# Altium PCB LP_LED_CUBE_8x8x8.PcbDoc (part 1 of 2)
Units mil, origin at the board's own origin, x right, y up, seen from the top; angles counter-clockwise.
Board outline 5225 x 2860 mil, 2 copper layers (Top Layer, Bottom Layer); 188 components, 245 nets, 933 pads, 0 vias.
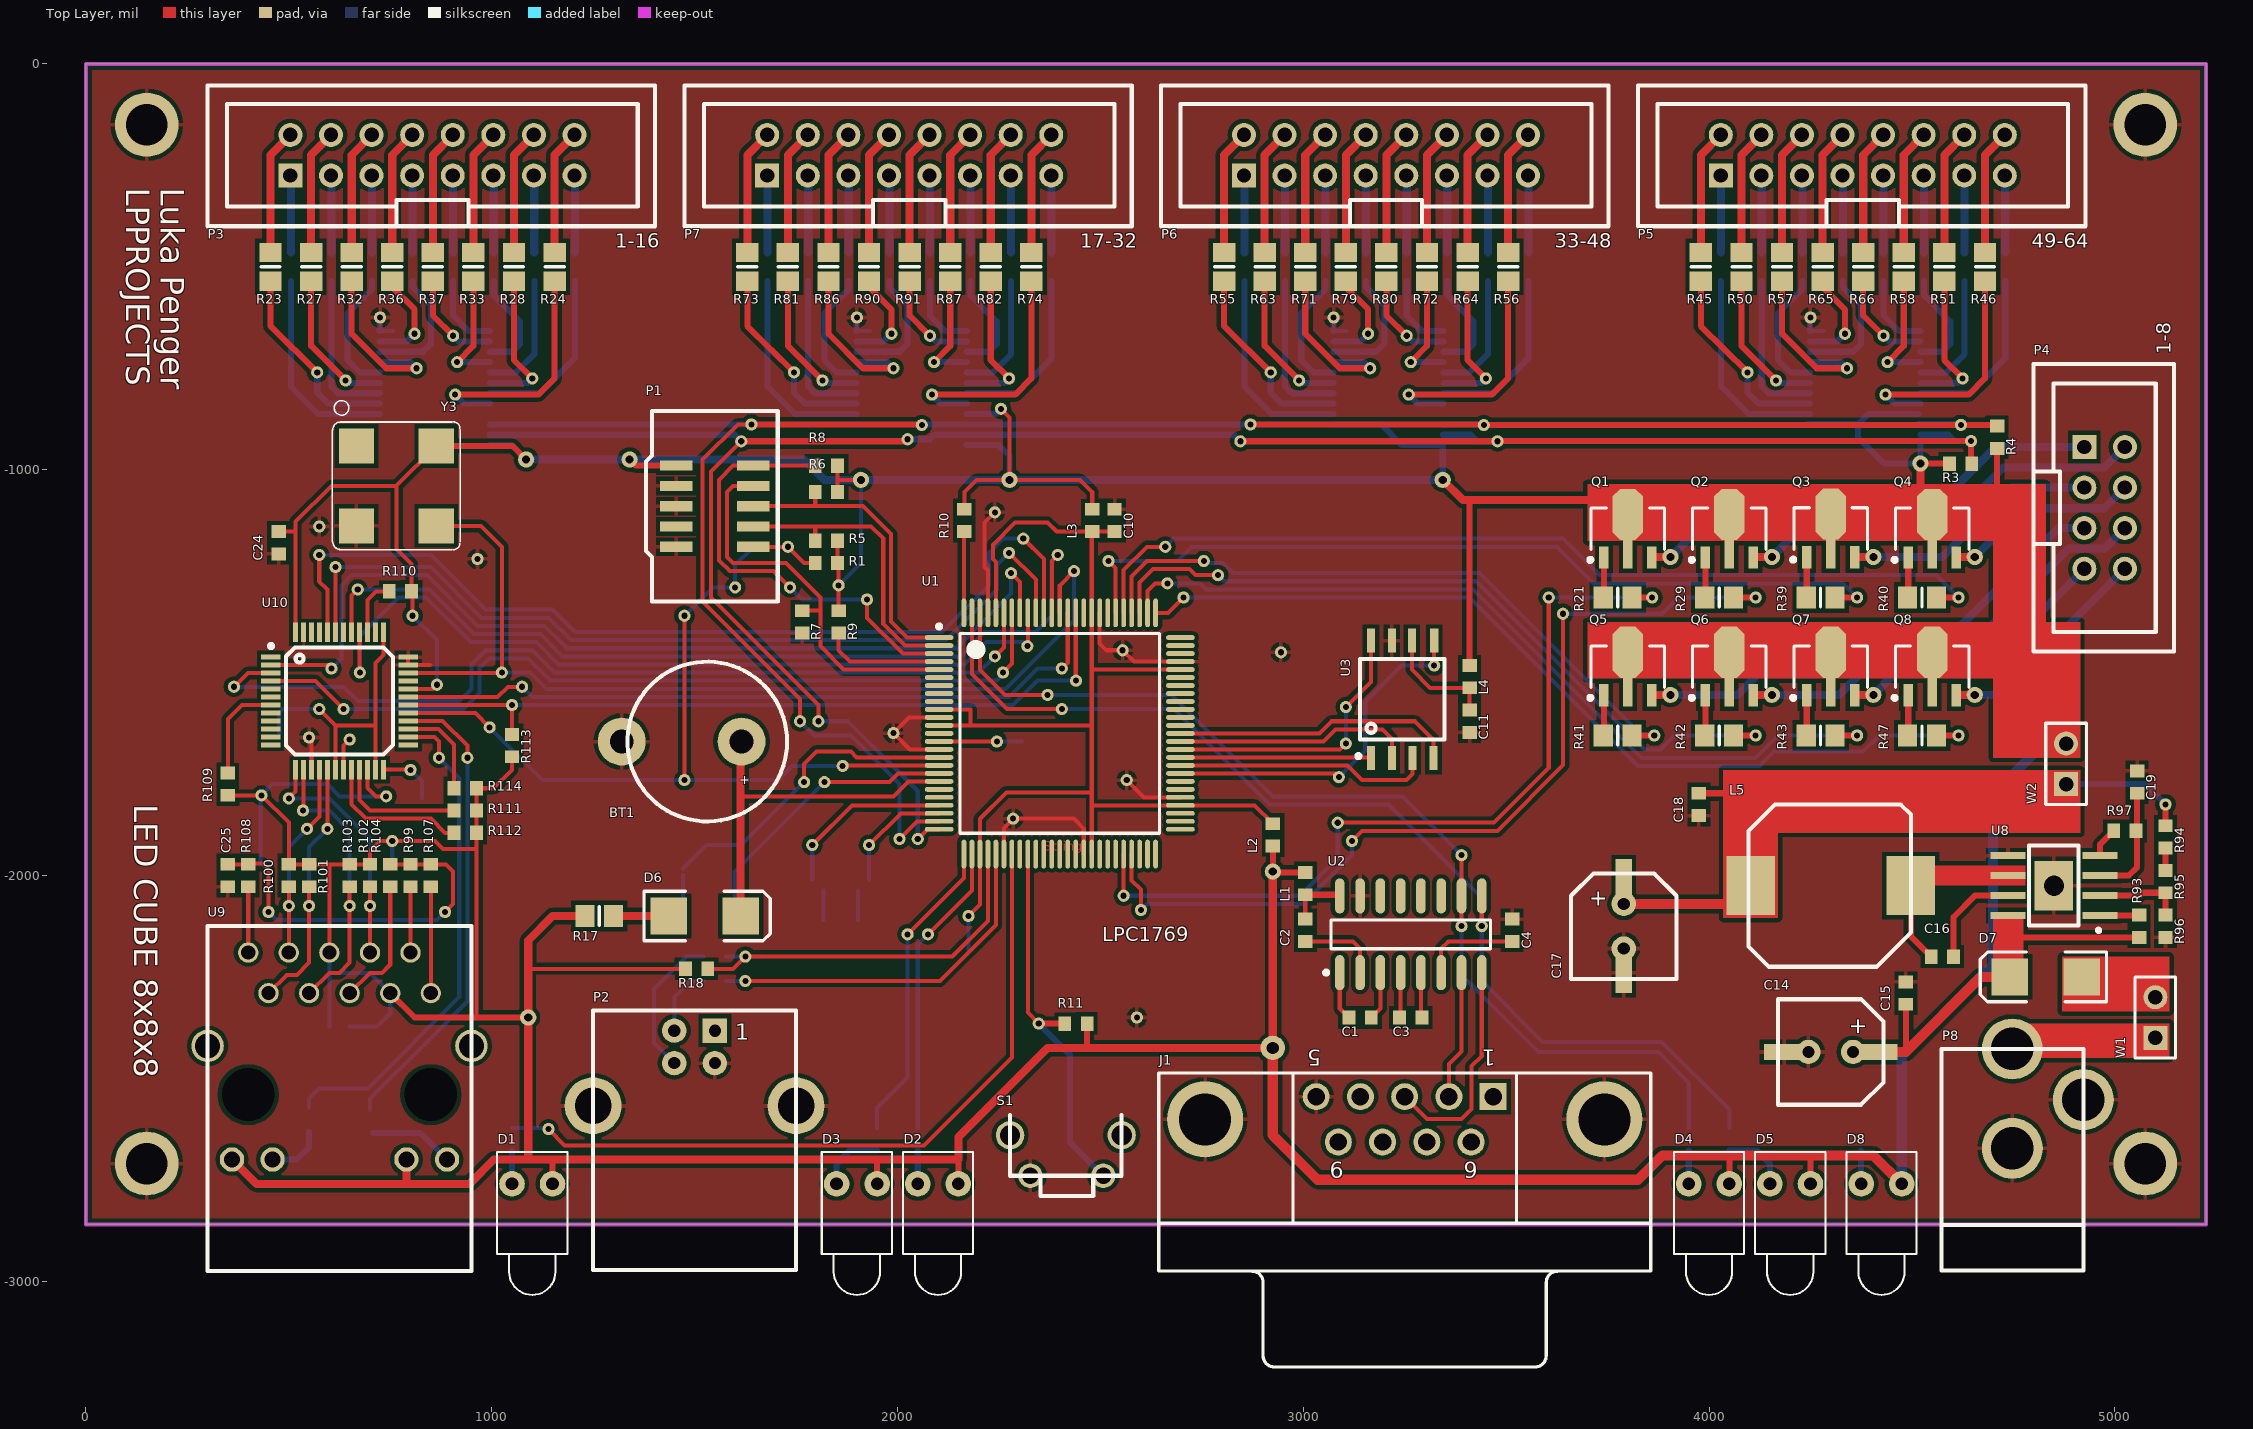
[diagram p0: Top Layer view]
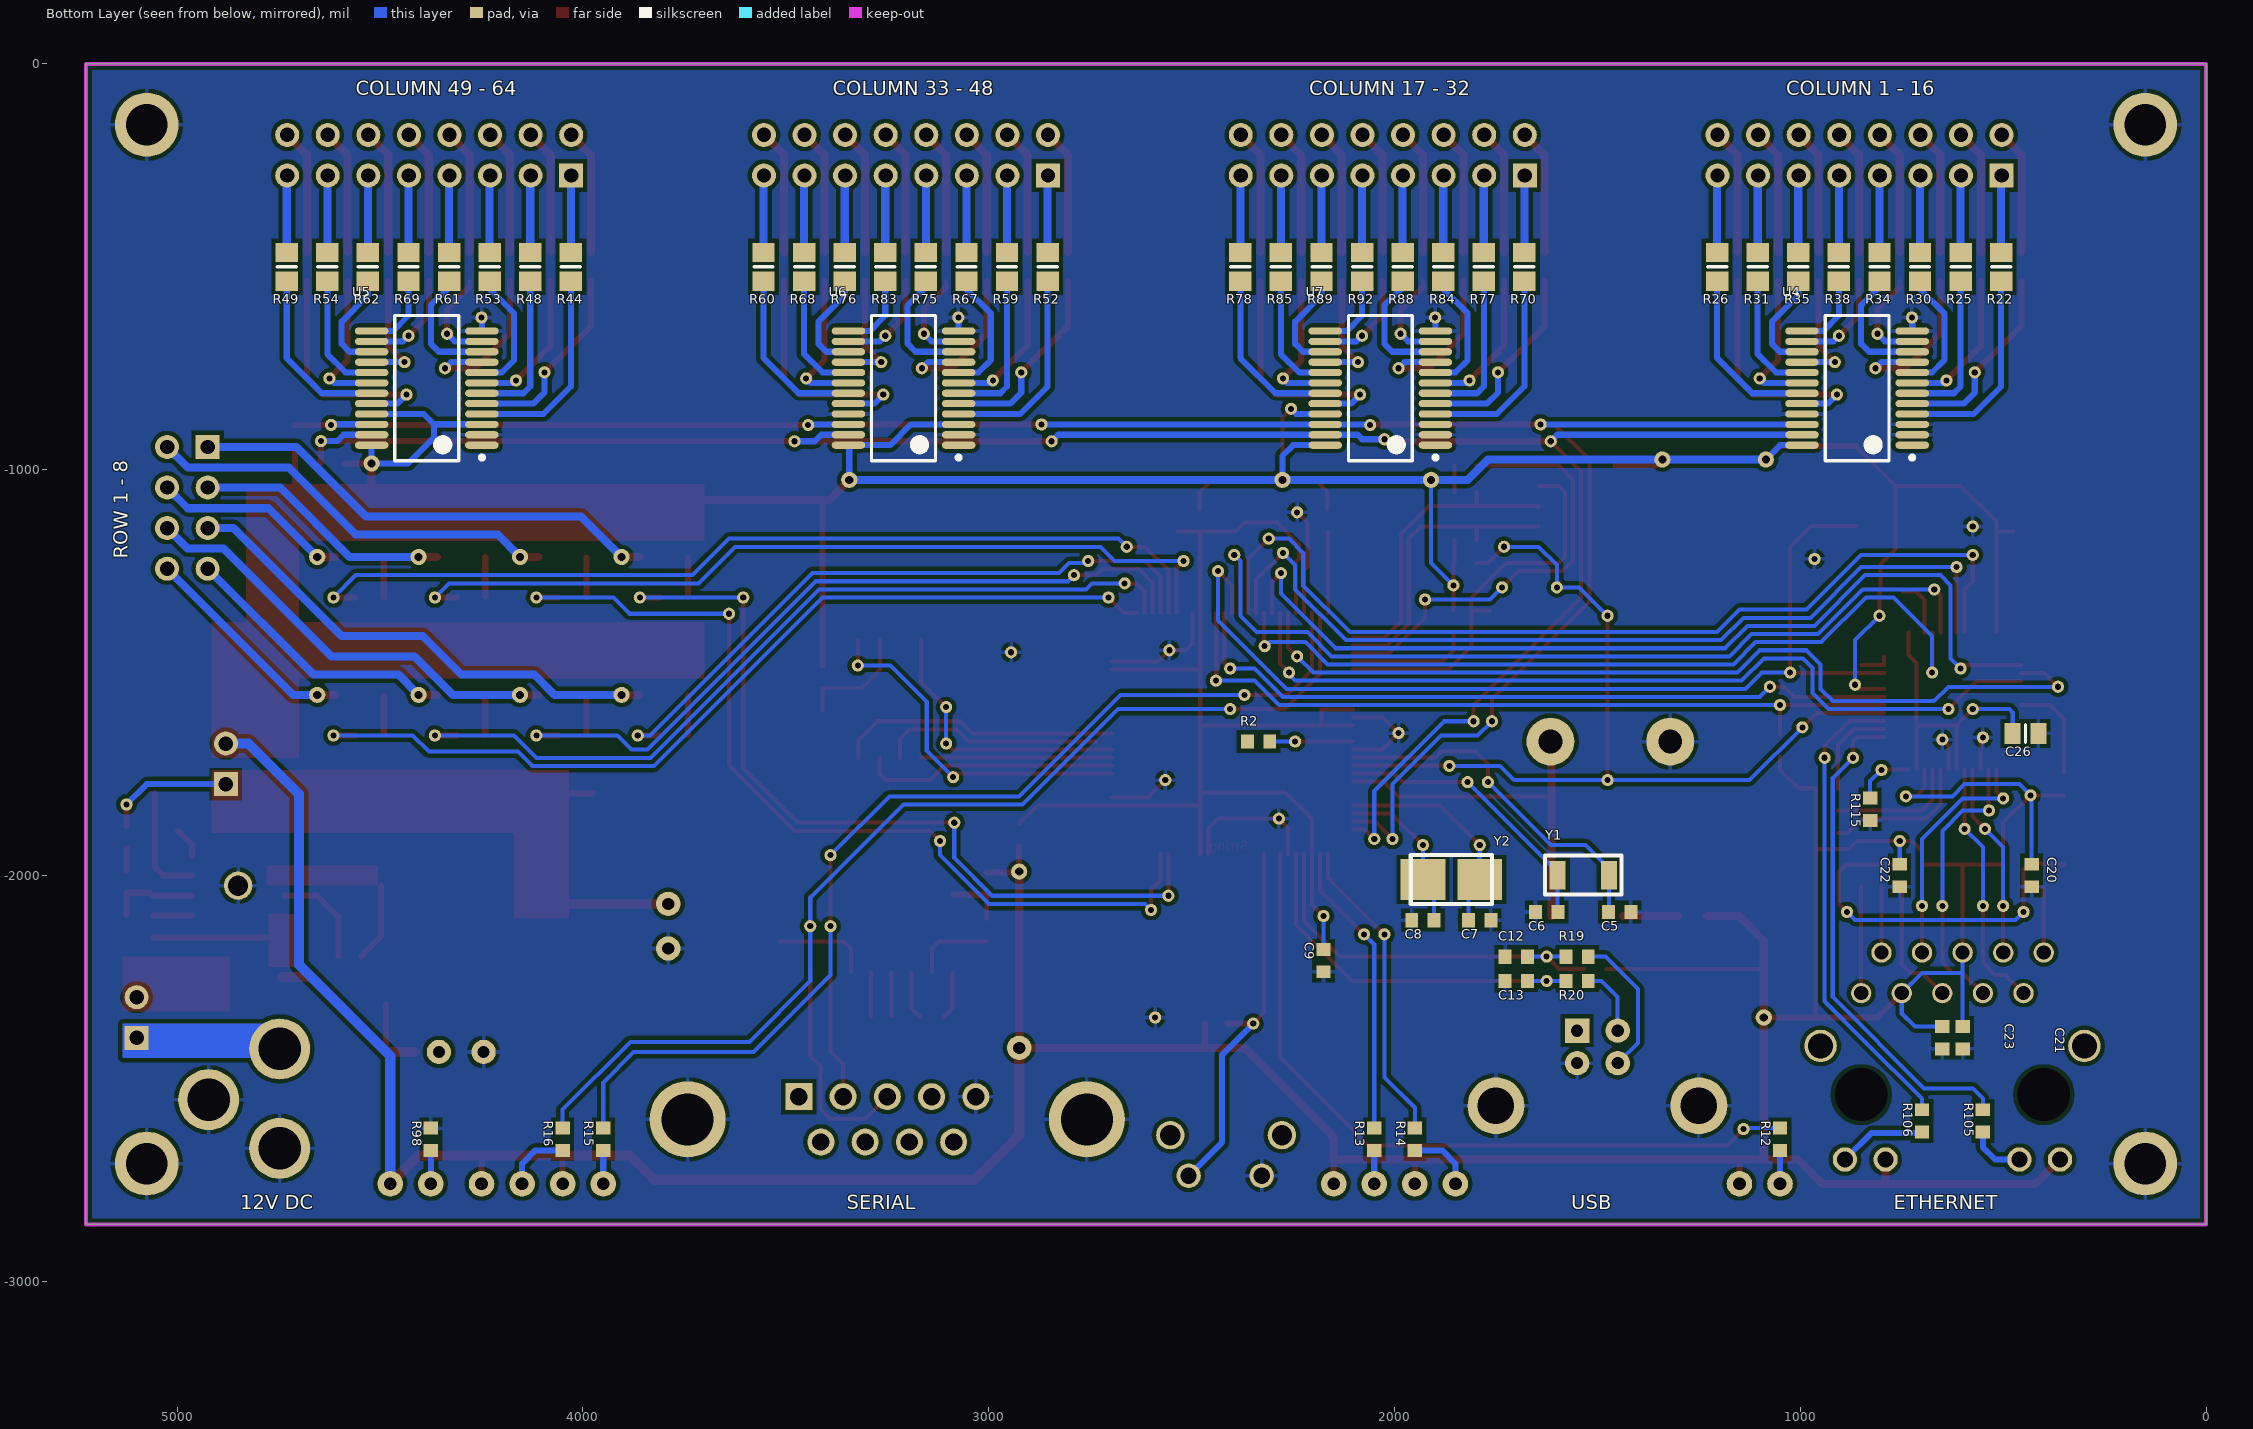
[diagram p1: Bottom Layer view, seen from below]

## Layer stack, top to bottom
Top Layer: signal copper 1.4
Dielectric: dielectric 12.6, FR-4, Dk 4.8
Bottom Layer: signal copper 1.4

## Board outline
5225,-2860 5225,0 0,0 0,-2860

## Design rules (kind name [scope] priority, off if disabled: settings)
Clearance [All] p1: gap=10
PolygonConnect [All] p1: connectstyle=Relief reliefconductorwidth=10 reliefentries=4 polygonreliefangle="90 Angle"
RoutingVias [All] p1: holewidth=28 width=50 viastyle="Through Hole" minholewidth=28 minwidth=50 maxholewidth=28 maxwidth=50
SilkscreenOverComponentPads [All] p1: minsilkscreentomaskgap=10
SolderMaskExpansion [All] p1: expansion=4
Width [All] p1: maxlimit=10 minlimit=10 preferedwidth=10
27 further rules are at their usual default settings.

## Classes and differential pairs
component class POWER: C14 C15 C16 C17 C18 C19 D7 D8 L5 P8 R93 R94 R95 R96 R97 R98 U8 W1 W2
component class LED: P3 P4 P5 P6 P7 Q1 Q2 Q3 Q4 Q5 Q6 Q7 Q8 R21 R22 R23 R24 R25 R26 R27 R28 R29 R30 R31 R32 R33 R34 R35 R36 R37 R38 R39 R40 R41 R42 R43 R44 R45 R46 R47 R48 R49 R50 R51 R52 R53 R54 R55 R56 R57 R58 R59 R60 R61 R62 R63 R64 R65 R66 R67 R68 R69 R70 R71 R72 R73 R74 R75 R76 R77 R78 R79 R80 R81 R82 R83 R84 R85 R86 R87 R88 R89 R90 R91 R92 U4 U5 U6 U7
component class ETH: C20 C21 C22 C23 C24 C25 C26 R99 R100 R101 R102 R103 R104 R105 R106 R107 R108 R109 R110 R111 R112 R113 R114 R115 U9 U10 Y3
component class CPU: BT1 C1 C2 C3 C4 C5 C6 C7 C8 C9 C10 C11 C12 C13 D1 D2 D3 D4 D5 D6 J1 L1 L2 L3 L4 P1 P2 R1 R2 R3 R4 R5 R6 R7 R8 R9 R10 R11 R12 R13 R14 R15 R16 R17 R18 R19 R20 S1 U1 U2 U3 Y1 Y2

## Components (designator, comment, footprint, x,y, rotation, side; value= is the part's Value field where it differs from the comment)
BT1 "Battery" "Battery capacitor" 1665,-1670 r180 top locked
C1 "100n" 1608[0603] 3140,-2350 r180 top locked
C2 "100n" 1608[0603] 3005,-2135 r90 top locked
C3 "100n" 1608[0603] 3265,-2350 r180 top locked
C4 "100n" 1608[0603] 3515,-2135 r270 top locked
C5 "22p" 1608[0603] 1445,-2090 r0 bottom
C6 "22p" 1608[0603] 1625,-2090 r180 bottom
C7 "22p" 1608[0603] 1790,-2110 r0 bottom locked
C8 "22p" 1608[0603] 1930,-2110 r180 bottom locked
C9 "100n" 1608[0603] 2175,-2210 r270 bottom locked
C10 "100n" 1608[0603] 2535,-1125 r270 top
C11 "100n" 1608[0603] 3410,-1620 r90 top
C12 "18p" 1608[0603] 1700,-2200 r0 bottom locked
C13 "18p" 1608[0603] 1700,-2260 r0 bottom locked
C14 "220uF" "SMD CAPACITOR 220uF" 4300,-2435 r270 top locked
C15 "100n" 1608[0603] 4485,-2290 r90 top
C16 "0.47uF" 1608[0603] 4575,-2200 r180 top locked
C17 "220uF" "SMD CAPACITOR 220uF" 3790,-2125 r0 top locked
C18 "100n" 1608[0603] 3975,-1825 r270 top locked
C19 "0.47uF" 1608[0603] 5055,-1770 r90 top
C20 "100n" 1608[0603] 430,-2000 r90 bottom locked
C21 "100n" 1608[0603] 650,-2400 r90 bottom
C22 "100n" 1608[0603] 755,-2000 r90 bottom locked
C23 "100n" 1608[0603] 600,-2400 r90 bottom
C24 "100n" 1608[0603] 475,-1180 r90 top locked
C25 "100n" 1608[0603] 350,-2000 r270 top locked
C26 "100n" 6-0805_L 445,-1650 r180 bottom locked
D1 "USB LED" LED-1 1100,-2760 r270 top locked
D2 "LED1" LED-1 2100,-2760 r270 top locked
D3 "LED2" LED-1 1900,-2760 r270 top locked
D4 "LED4" LED-1 4000,-2760 r270 top locked
D5 "LED5" LED-1 4200,-2760 r270 top locked
D6 "D Schottky" SMB 1525,-2100 r0 top locked
D7 "Schottky" SMB 4830,-2250 r180 top locked
D8 "POWER LED" LED-1 4425,-2760 r270 top locked
J1 "RS232" DSUB1.385-2H9 3250,-2975 r180 top locked
L1 "Inductor" 1608[0603] 3005,-2020 r90 top locked
L2 "Inductor" 1608[0603] 2925,-1900 r90 top locked
L3 "Inductor" 1608[0603] 2480,-1125 r270 top
L4 "Inductor" 1608[0603] 3410,-1510 r90 top
L5 "1.5uH" Inductor 4300,-2025 r180 top locked
P1 "JTAG Connector ULINK" "JTAG Connector ULINK" 1550,-1090 r0 top locked
P2 "USB B" "USB B" 1500,-2475 r0 top locked
P3 "Header 8X2" IDC-2x8 300,-400 r0 top locked
P4 "Header 8" IDC-2x4 4800,-740 r270 top
P5 "Header 8X2" IDC-2x8 3825,-400 r0 top locked
P6 "Header 8X2" IDC-2x8 2650,-400 r0 top locked
P7 "Header 8X2" IDC-2x8 1475,-400 r0 top locked
P8 "DC Connector" "DC Connector" 4835,-2550 r180 top locked
Q1 "NPN" SOT89N 3800,-1145.43 r90 top locked
Q2 "NPN" SOT89N 4050,-1145.43 r90 top locked
Q3 "NPN" SOT89N 4300,-1145 r90 top
Q4 "NPN" SOT89N 4550,-1145.43 r90 top locked
Q5 "NPN" SOT89N 3800,-1485.43 r90 top locked
Q6 "NPN" SOT89N 4050,-1485.43 r90 top locked
Q7 "NPN" SOT89N 4300,-1485.43 r90 top locked
Q8 "NPN" SOT89N 4550,-1485.43 r90 top locked
R1 "10k" 1608[0603] 1825,-1230 r0 top locked
R2 "NO" 1608[0603] 2335,-1670 r0 bottom locked
R3 "2k2" 1608[0603] 4620,-985 r0 top locked
R4 "2k2" 1608[0603] 4710,-920 r90 top locked
R5 "10k" 1608[0603] 1825,-1175 r0 top locked
R6 "10k" 1608[0603] 1825,-1055 r0 top
R7 "10k" 1608[0603] 1765,-1375 r270 top
R8 "10k" 1608[0603] 1825,-990 r0 top locked
R9 "10k" 1608[0603] 1855,-1375 r90 top locked
R10 "10k" 1608[0603] 2165,-1125 r90 top locked
R11 "1k" 1608[0603] 2440,-2365 r180 top locked
R12 "470R" 1608[0603] 1050,-2650 r270 bottom locked
R13 "470R" 1608[0603] 2050,-2650 r270 bottom locked
R14 "470R" 1608[0603] 1950,-2650 r270 bottom locked
R15 "470R" 1608[0603] 3950,-2650 r270 bottom locked
R16 "470R" 1608[0603] 4050,-2650 r270 bottom locked
R17 "50R" 6-0805_N 1265,-2100 r180 top locked
R18 "1k5" 1608[0603] 1505,-2230 r0 top locked
R19 "33R" 1608[0603] 1550,-2200 r180 bottom locked
R20 "33R" 1608[0603] 1550,-2260 r180 bottom locked
R21 "1k" 6-0805_N 3775,-1315 r0 top locked
R22 "100R" 6-0805_N 505,-500 r270 bottom locked
R23 "100R" 6-0805_N 455,-500 r270 top locked
R24 "100R" 6-0805_N 1155,-500 r90 top locked
R25 "100R" 6-0805_N 605,-500 r270 bottom locked
R26 "100R" 6-0805_N 1205,-500 r90 bottom locked
R27 "100R" 6-0805_N 555,-500 r270 top locked
R28 "100R" 6-0805_N 1055,-500 r90 top locked
R29 "1k" 6-0805_N 4025,-1315 r0 top locked
R30 "100R" 6-0805_N 705,-500 r270 bottom locked
R31 "100R" 6-0805_N 1105,-500 r90 bottom locked
R32 "100R" 6-0805_N 655,-500 r270 top locked
R33 "100R" 6-0805_N 955,-500 r90 top locked
R34 "100R" 6-0805_N 805,-500 r270 bottom locked
R35 "100R" 6-0805_N 1005,-500 r90 bottom locked
R36 "100R" 6-0805_N 755,-500 r270 top locked
R37 "100R" 6-0805_N 855,-500 r90 top locked
R38 "100R" 6-0805_N 905,-500 r90 bottom locked
R39 "1k" 6-0805_N 4275,-1315 r0 top locked
R40 "1k" 6-0805_N 4525,-1315 r0 top locked
R41 "1k" 6-0805_N 3775,-1655 r0 top locked
R42 "1k" 6-0805_N 4025,-1655 r0 top locked
R43 "1k" 6-0805_N 4275,-1655 r0 top locked
R44 "100R" 6-0805_N 4030,-500 r270 bottom locked
R45 "100R" 6-0805_N 3980,-500 r270 top locked
R46 "100R" 6-0805_N 4680,-500 r90 top locked
R47 "1k" 6-0805_N 4525,-1655 r0 top locked
R48 "100R" 6-0805_N 4130,-500 r270 bottom locked
R49 "100R" 6-0805_N 4730,-500 r90 bottom locked
R50 "100R" 6-0805_N 4080,-500 r270 top locked
R51 "100R" 6-0805_N 4580,-500 r90 top locked
R52 "100R" 6-0805_N 2855,-500 r270 bottom locked
R53 "100R" 6-0805_N 4230,-500 r270 bottom locked
R54 "100R" 6-0805_N 4630,-500 r90 bottom locked
R55 "100R" 6-0805_N 2805,-500 r270 top locked
R56 "100R" 6-0805_N 3505,-500 r90 top locked
R57 "100R" 6-0805_N 4180,-500 r270 top locked
R58 "100R" 6-0805_N 4480,-500 r90 top locked
R59 "100R" 6-0805_N 2955,-500 r270 bottom locked
R60 "100R" 6-0805_N 3555,-500 r90 bottom locked
R61 "100R" 6-0805_N 4330,-500 r270 bottom locked
R62 "100R" 6-0805_N 4530,-500 r90 bottom locked
R63 "100R" 6-0805_N 2905,-500 r270 top locked
R64 "100R" 6-0805_N 3405,-500 r90 top locked
R65 "100R" 6-0805_N 4280,-500 r270 top locked
R66 "100R" 6-0805_N 4380,-500 r90 top locked
R67 "100R" 6-0805_N 3055,-500 r270 bottom locked
R68 "100R" 6-0805_N 3455,-500 r90 bottom locked
R69 "100R" 6-0805_N 4430,-500 r90 bottom locked
R70 "100R" 6-0805_N 1680,-500 r270 bottom locked
R71 "100R" 6-0805_N 3005,-500 r270 top locked
R72 "100R" 6-0805_N 3305,-500 r90 top locked
R73 "100R" 6-0805_N 1630,-500 r270 top locked
R74 "100R" 6-0805_N 2330,-500 r90 top locked
R75 "100R" 6-0805_N 3155,-500 r270 bottom locked
R76 "100R" 6-0805_N 3355,-500 r90 bottom locked
R77 "100R" 6-0805_N 1780,-500 r270 bottom locked
R78 "100R" 6-0805_N 2380,-500 r90 bottom locked
R79 "100R" 6-0805_N 3105,-500 r270 top locked
R80 "100R" 6-0805_N 3205,-500 r90 top locked
R81 "100R" 6-0805_N 1730,-500 r270 top locked
R82 "100R" 6-0805_N 2230,-500 r90 top locked
R83 "100R" 6-0805_N 3255,-500 r90 bottom locked
R84 "100R" 6-0805_N 1880,-500 r270 bottom locked
R85 "100R" 6-0805_N 2280,-500 r90 bottom locked
R86 "100R" 6-0805_N 1830,-500 r270 top locked
R87 "100R" 6-0805_N 2130,-500 r90 top locked
R88 "100R" 6-0805_N 1980,-500 r270 bottom locked
R89 "100R" 6-0805_N 2180,-500 r90 bottom locked
R90 "100R" 6-0805_N 1930,-500 r270 top locked
R91 "100R" 6-0805_N 2030,-500 r90 top locked
R92 "100R" 6-0805_N 2080,-500 r90 bottom locked
R93 "10k" 1608[0603] 5060,-2125 r270 top locked
R94 "0R" 1608[0603] 5125,-1905 r90 top locked
R95 "226k" 1608[0603] 5125,-2015 r90 top locked
R96 "49.9k" 1608[0603] 5125,-2125 r90 top locked
R97 "100k" 1608[0603] 5025,-1890 r0 top locked
R98 "470R" 1608[0603] 4375,-2650 r270 bottom locked
R99 "75R" 1608[0603] 800,-2000 r90 top locked
R100 "50R" 1608[0603] 500,-2000 r90 top
R101 "50R" 1608[0603] 550,-2000 r90 top
R102 "50R" 1608[0603] 700,-2000 r90 top locked
R103 "50R" 1608[0603] 650,-2000 r90 top locked
R104 "75R" 1608[0603] 750,-2000 r90 top locked
R105 "470R" 1608[0603] 550,-2605 r90 bottom locked
R106 "470R" 1608[0603] 700,-2605 r90 bottom locked
R107 "75R" 1608[0603] 850,-2000 r270 top locked
R108 "75R" 1608[0603] 400,-2000 r270 top locked
R109 "10k" 1608[0603] 350,-1775 r270 top locked
R110 "2k2" 1608[0603] 775,-1300 r180 top locked
R111 "2k2" 1608[0603] 935,-1840 r180 top locked
R112 "2k2" 1608[0603] 935,-1895 r0 top locked
R113 "2k2" 1608[0603] 1050,-1680 r90 top locked
R114 "2k2" 1608[0603] 935,-1785 r180 top locked
R115 "4k7" 1608[0603] 827.72,-1836.81 r270 bottom locked
S1 "FW Update" SWITCH-TACTILE-90 2415,-2690 r0 top locked
U1 "LPC1768FBD100" SOT407-1_N 2400,-1650 r0 top locked
U2 "MAX2232" SOIC16_N 3265,-2145 r90 top locked
U3 "AT45DB321D" AT45DB321D 3245,-1565 r90 top
U4 "PCA9555" SSOP24_N 860,-850 r0 bottom locked
U5 "PCA9555" SSOP24_N 4385,-850 r0 bottom locked
U6 "PCA9555" SSOP24_N 3210,-850 r0 bottom locked
U7 "PCA9555" SSOP24_N 2035,-850 r0 bottom locked
U8 "TPS56528" TPS56528 4850,-2025 r180 top locked
U9 "RJ45 Ethernet" "RJ45 Ethernet connector" 625,-2445 r90 top locked
U10 "DP83848C" DP83848C 625,-1570 r0 top locked
W1 "Jumper" HDR1X2 5100,-2400 r90 top locked
W2 "Jumper" HDR1X2 4880,-1775 r90 top locked
Y1 "32.768KHz" "Crystal 4.1x1.5" 1535,-2000 r0 bottom locked
Y2 "12MHz" "5x3.2 Crystal" 1860,-2010 r0 bottom locked
Y3 "XTAL 50MHz" "XTAL ACT9200" 765,-1040 r270 top locked

## Footprints (in the part's own frame and the unit in brackets; to place one, negate y for a bottom-side part, rotate by r counter-clockwise, add the part's x,y. Pads: shape width x height; smd on the part's side, far side on the other; paste and mask are expansions set on the pad)
"5x3.2 Crystal" [mil]
  rect 110x100 smd: 1(-70,0) 2(70,0)
  silkscreen extent -100,-60 100,60
6-0805_L [mm] "Chip Resistor, Body 2.0x1.2mm, IPC High Density"
  rect 1x1.3 smd: 1(-0.8,0) 2(0.8,0)
  silkscreen extent 0,-0.55 0,0.55, body extent -1.07,-0.7 1.07,0.7, height 0.7
6-0805_N [mm] "Chip Resistor, Body 2.0x1.2mm, IPC Medium Density"
  rect 1.2x1.4 smd: 1(-0.9,0) 2(0.9,0)
  silkscreen extent 0,-0.6 0,0.6, body extent -1.07,-0.7 1.07,0.7, height 0.7
1608[0603] [mm] "Chip Capacitor, Body 1.6x0.8mm, IPC High Density"
  rect 0.8x0.9 smd: 1(-0.7,0) 2(0.7,0)
  body extent -0.87,-0.48 0.87,0.48, height 1.3
AT45DB321D [mm] "SPI Flash SOIC 8"
  rect 1.5x0.508 smd: 1(-3.7,1.975) 2(-3.7,0.675) 3(-3.7,-0.625) 4(-3.7,-1.925) 5(3.65,-1.975) 6(3.65,-0.575) 7(3.65,0.675) 8(3.65,1.975)
  silkscreen extent -3.7,-2.62 2.5,2.9
"Battery capacitor" [mm] "Battery cap"
  round 3 hole 1.5: 1(1.25,0) 2(8.75,0)
  silkscreen extent -1.6,-5 8.4,5
"Crystal 4.1x1.5" [mm] "Crystal 4.1x1.5"
  rect 1x1.8 smd: 1(-1.6,-0.02) 2(1.6,-0.02)
  silkscreen extent -2.4,-1.25 2.4,1.2
"DC Connector" [mil]
  round 150 hole 105: 1(87.5,-122.5) 2(87.5,122.5) 3(-87.5,2.5)
  silkscreen extent -88,-123 262,423
DP83848C [mm] "Ethernet PHY LQFP48"
  rect 1.2x0.3 smd: 1(-4.3,2.75) 2(-4.3,2.25) 3(-4.3,1.75) 4(-4.3,1.25) 5(-4.3,0.75) 6(-4.3,0.25) 7(-4.3,-0.25) 8(-4.3,-0.75) 9(-4.3,-1.25) 10(-4.3,-1.75) 11(-4.3,-2.25) 12(-4.3,-2.75) 25(4.3,-2.75) 26(4.3,-2.25) 27(4.3,-1.75) 28(4.3,-1.25) 29(4.3,-0.75) 30(4.3,-0.25) 31(4.3,0.25) 32(4.3,0.75) 33(4.3,1.25) 34(4.3,1.75) 35(4.3,2.25) 36(4.3,2.75)
  rect 0.3x1.2 smd: 13(-2.75,-4.3) 14(-2.25,-4.3) 15(-1.75,-4.3) 16(-1.25,-4.3) 17(-0.75,-4.3) 18(-0.25,-4.3) 19(0.25,-4.3) 20(0.75,-4.3) 21(1.25,-4.3) 22(1.75,-4.3) 23(2.25,-4.3) 24(2.75,-4.3) 37(2.75,4.3) 38(2.25,4.3) 39(1.75,4.3) 40(1.25,4.3) 41(0.75,4.3) 42(0.25,4.3) 43(-0.25,4.3) 44(-0.75,4.3) 45(-1.25,4.3) 46(-1.75,4.3) 47(-2.25,4.3) 48(-2.75,4.3)
  silkscreen extent -4.41,-3.35 3.35,3.56
DSUB1.385-2H9 [mm] "Connector; D Subminiature; 9 Position; Right Angle; Pitch 1.385 mm"
  rect 1.69x1.69 hole 1.09: 1(-5.54,-10.92)
  round 1.69 hole 1.09: 2(-2.77,-10.92) 3(0,-10.92) 4(2.77,-10.92) 5(5.54,-10.92) 6(-4.155,-8.08) 7(-1.385,-8.08) 8(1.385,-8.08) 9(4.155,-8.08)
  round 4.76 hole 3.26: 10(-12.495,-9.5) 11(12.495,-9.5)
  silkscreen extent -15.4,-12.4 15.4,6
HDR1X2 [mm] "Connector; Header; 2 Position"
  rect 1.5x1.5 hole 0.9: 1(0,0)
  round 1.5 hole 0.9: 2(2.54,0)
  silkscreen extent -1.27,-1.27 3.81,1.27
IDC-2x4 [mm] "IDC Male Connector"
  rect 1.5x1.5 hole 0.9: 1(5.182,3.175)
  round 1.5 hole 0.9: 2(5.182,5.715) 3(7.722,3.175) 4(7.722,5.715) 5(10.262,3.175) 6(10.262,5.715) 7(12.802,3.175) 8(12.802,5.715)
  silkscreen extent 0,0 17.98,8.8
IDC-2x8 [mm] "IDC Male Connector"
  rect 1.5x1.5 hole 0.9: 1(5.182,3.175)
  round 1.5 hole 0.9: 2(5.182,5.715) 3(7.722,3.175) 4(7.722,5.715) 5(10.262,3.175) 6(10.262,5.715) 7(12.802,3.175) 8(12.802,5.715) 9(15.342,3.175) 10(15.342,5.715) 11(17.882,3.175) 12(17.882,5.715) 13(20.422,3.175) 14(20.422,5.715) 15(22.962,3.175) 16(22.962,5.715)
  silkscreen extent 0,0 28,8.8
Inductor [mil]
  rect 120x145 smd: 1(-197.5,0) 2(197.5,0)
  silkscreen extent -198,-200 203,200
"JTAG Connector ULINK" [mil]
  rect 80x25 smd: 1(-95,100) 2(95,100) 3(-95,50) 4(95,50) 5(-95,0) 6(95,0) 7(-95,-50) 8(95,-50) 9(-95,-100) 10(95,-100)
  silkscreen extent -170,-235 155,235
LED-1 [mm] "LED; 2 Leads"
  round 1.6 hole 0.8: 1(0,1.27) 2(0,-1.27)
  silkscreen extent -2,-2.2 6.95,2.2
"RJ45 Ethernet connector" [mil]
  round 50 hole 35: 1(155,175) 2(255,125) 3(155,75) 4(255,25) 5(155,-25) 6(255,-75) 7(155,-125) 8(255,-175) 9(255,225) 10(155,-225)
  round 60 hole 40: 11(-255,265) 12(-255,165) 13(-255,-165) 14(-255,-265)
  round 80 hole 62: GND(25,325) GND(25,-325)
  round 0 hole 130: ""(-95,225) ""(-95,-225)
  silkscreen extent -530,-325 320,325
SMB [mm] "DO-214-AA/SMB; 2 C-Bend Leads; Body 5.3 x 3.6 mm, inc. leads (LxW)"
  rect 2.3x2.3 smd: 1(-2.25,0) 2(2.25,0)
  silkscreen extent -3.8,-1.55 4.1,1.55
"SMD CAPACITOR 220uF" [mil]
  rect 40x100 smd: 1(0,115) 2(0,-115)
  round 60 hole 30: 1(0,55) 2(0,-55)
  silkscreen extent -130,-130 130,130
SOIC16_N [mm] "SOIC, 16-Leads, Body 9.9x3.9mm, Pitch 1.27mm, IPC Medium Density"
  oval 2.2x0.6 smd: 1(-2.4,4.445) 2(-2.4,3.175) 3(-2.4,1.905) 4(-2.4,0.635) 5(-2.4,-0.635) 6(-2.4,-1.905) 7(-2.4,-3.175) 8(-2.4,-4.445) 9(2.4,-4.445) 10(2.4,-3.175) 11(2.4,-1.905) 12(2.4,-0.635) 13(2.4,0.635) 14(2.4,1.905) 15(2.4,3.175) 16(2.4,4.445)
  silkscreen extent -2.52,-5 0.9,5.42, body extent -2,-5 2,5, height 1.91
SOT89N [mm] "SOT89, 3-Leads, Body 4.5x2.4 mm, Pitch 1.5mm, Lead Span 4.1mm, IPC Medium Density"
  rect 1.8x0.6 smd: 1(-1.6,0)
  oct 3.2x1.9 smd: 1(0.9,0)
  rect 1.4x0.6 smd: 2(-1.8,1.5) 3(-1.8,-1.5)
  silkscreen extent -2.07,-2.3 1.3,2.47, body extent -1.3,-2.3 1.3,2.3, height 1.6
SOT407-1_N [mm] "Thin QFP, 100-Leads, Body 14x14mm, Pitch 0.5mm, IPC Medium Density"
  oval 1.8x0.3 smd: 1(-7.55,6) 2(-7.55,5.5) 3(-7.55,5) 4(-7.55,4.5) 5(-7.55,4) 6(-7.55,3.5) 7(-7.55,3) 8(-7.55,2.5) 9(-7.55,2) 10(-7.55,1.5) 11(-7.55,1) 12(-7.55,0.5) 13(-7.55,0) 14(-7.55,-0.5) 15(-7.55,-1) 16(-7.55,-1.5) 17(-7.55,-2) 18(-7.55,-2.5) 19(-7.55,-3) 20(-7.55,-3.5) 21(-7.55,-4) 22(-7.55,-4.5) 23(-7.55,-5) 24(-7.55,-5.5) 25(-7.55,-6) 51(7.55,-6) 52(7.55,-5.5) 53(7.55,-5) 54(7.55,-4.5) 55(7.55,-4) 56(7.55,-3.5) 57(7.55,-3) 58(7.55,-2.5) 59(7.55,-2) 60(7.55,-1.5) 61(7.55,-1) 62(7.55,-0.5) 63(7.55,0) 64(7.55,0.5) 65(7.55,1) 66(7.55,1.5) 67(7.55,2) 68(7.55,2.5) 69(7.55,3) 70(7.55,3.5) 71(7.55,4) 72(7.55,4.5) 73(7.55,5) 74(7.55,5.5) 75(7.55,6)
  oval 0.3x1.8 smd: 26(-6,-7.55) 27(-5.5,-7.55) 28(-5,-7.55) 29(-4.5,-7.55) 30(-4,-7.55) 31(-3.5,-7.55) 32(-3,-7.55) 33(-2.5,-7.55) 34(-2,-7.55) 35(-1.5,-7.55) 36(-1,-7.55) 37(-0.5,-7.55) 38(0,-7.55) 39(0.5,-7.55) 40(1,-7.55) 41(1.5,-7.55) 42(2,-7.55) 43(2.5,-7.55) 44(3,-7.55) 45(3.5,-7.55) 46(4,-7.55) 47(4.5,-7.55) 48(5,-7.55) 49(5.5,-7.55) 50(6,-7.55) 76(6,7.55) 77(5.5,7.55) 78(5,7.55) 79(4.5,7.55) 80(4,7.55) 81(3.5,7.55) 82(3,7.55) 83(2.5,7.55) 84(2,7.55) 85(1.5,7.55) 86(1,7.55) 87(0.5,7.55) 88(0,7.55) 89(-0.5,7.55) 90(-1,7.55) 91(-1.5,7.55) 92(-2,7.55) 93(-2.5,7.55) 94(-3,7.55) 95(-3.5,7.55) 96(-4,7.55) 97(-4.5,7.55) 98(-5,7.55) 99(-5.5,7.55) 100(-6,7.55)
  silkscreen extent -7.67,-6.25 6.25,6.82, body extent -7,-7 7,7, height 1.6
SSOP24_N [mm] "SOP, 24-Leads, Body 6.2x5.3mm, Pitch 0.65mm, IPC Medium Density"
  oval 2.1x0.45 smd: 1(-3.45,2.275) 2(-3.45,1.625) 3(-3.45,0.975) 4(-3.45,0.325) 5(-3.45,-0.325) 6(-3.45,-0.975) 7(-3.45,-1.625) 8(-3.45,-2.275) 9(-3.45,-2.92) 10(-3.45,-3.57) 11(-3.45,-4.22) 12(-3.45,-4.87) 13(3.45,-4.87) 14(3.45,-4.22) 15(3.45,-3.57) 16(3.45,-2.92) 17(3.45,-2.275) 18(3.45,-1.625) 19(3.45,-0.975) 20(3.45,-0.325) 21(3.45,0.325) 22(3.45,0.975) 23(3.45,1.625) 24(3.45,2.275)
  silkscreen extent -3.57,-5.85 2,3.25, body extent -2.7,-5.85 2.7,3.25, height 2
SWITCH-TACTILE-90 [mil]
  round 60 hole 40: 1(-87.5,-50) 2(92.5,-50)
  round 70 hole 50: GND(-137.5,50) GND(137.5,50)
  silkscreen extent -138,-100 138,100
TPS56528 [mm] "Step-Down Converter SO PowerPAD"
  rect 2.2x0.45 smd: 1(-2.875,1.875) 2(-2.875,0.625) 3(-2.875,-0.625) 4(-2.875,-1.875) 5(2.875,-1.875) 6(2.875,-0.625) 7(2.875,0.625) 8(2.875,1.875)
  rect 2.4x3.1 smd: 5(0,0)
  silkscreen extent -2.9,-2.5 1.55,2.9
"USB B" [mil]
  rect 60x60 hole 30: 1(50,92.5)
  round 60 hole 30: 2(-50,92.5) 3(-50,12.5) 4(50,12.5)
  round 140 hole 90: 5(-250,-92.5) 5(250,-92.5)
  silkscreen extent -250,-498 250,142
"XTAL ACT9200" [mm]
  rect 2.2x2.2 smd mask-25.4: 1(-2.5,-2.5) 2(2.5,-2.5) 3(2.5,2.5) 4(-2.5,2.5)
  silkscreen extent -5.34,-4 4,4

## Part data
BT1: "Multicell Battery"
C1 C2 C3 C4 C5 C6 C7 C8 C9 C10 C11 C12 C13 C15 C16 C18 C19 C20 C21 C22 C23 C24 C25 C26: library part Cap, "Capacitor"
C14 C17: library part "Cap Pol1", "Capacitor"
D1 D2 D3 D4 D5 D8: library part LED0, "Typical INFRARED GaAs LED"
D6: "Schottky Diode"
D7: library part "D Schottky", "Schottky Diode"
J1: library part "D Connector 9", "Receptacle Assembly, 9 Position, Right Angle"
L5: library part "Inductor Iron", "Magnetic-Core Inductor"
P1: "JTAG Connector"
P2: "USB Connector"
P3 P5 P6 P7: "Header, 8-Pin, Dual row"
P4: "Header, 8-Pin"
P8: "DC Power Connector"
Q1 Q2 Q3 Q4 Q5 Q6 Q7 Q8: "NPN Bipolar Transistor"
R1 R2 R3 R4 R5 R6 R7 R8 R9 R10 R11 R12 R13 R14 R15 R16 R17 R18 R19 R20 R21 R22 R23 R24 R25 R26 R27 R28 R29 R30 R31 R32 R33 R34 R35 R36 R37 R38 R39 R40 R41 R42 R43 R44 R45 R46 R47 R48 R49 R50 R51 R52 R53 R54 R55 R56 R57 R58 R59 R60 R61 R62 R63 R64 R65 R66 R67 R68 R69 R70 R71 R72 R73 R74 R75 R76 R77 R78 R79 R80 R81 R82 R83 R84 R85 R86 R87 R88 R89 R90 R91 R92 R93 R94 R95 R96 R97 R98 R99 R100 R101 R102 R103 R104 R105 R106 R107 R108 R109 R110 R111 R112 R113 R114 R115: library part Res2, "Resistor"
S1: library part SW-PB, "Switch"
U1: "32-bit ARM Cortex-M3 microcontroller; up to 512 kB flash and 64 kB SRAM with Ethernet, USB 2.0 Host/Device/OTG, CAN"
U2: "Dual 232 +3V3"
U3: "SPI Flash 32MB"
U4 U5 U6 U7: "I2C I/O Ports"
U8: "Step-Down Converter 5A 4.5V-18V"
U9: "Ethernet Connector"
U10: "Ethernet PHY"
W1 W2: "Jumper Wire"
Y1 Y2: library part XTAL, "Crystal Oscillator"
Y3: library part "XTAL ACT9200"

## Free pads (board coordinates)
  round 30 hole 15: 0(575,-1140) 0(2665,-1280) 1(965,-1220) 1(2705,-1315) 2(550,-1660) 2(3605,-1315) 3(2285,-1860) 3(3640,-1355) 4(2590,-2350) 4(3085,-1870) 5(570,-760) 5(1745,-760) 5(2920,-760) 5(2945,-1450) 5(3120,-1915) 5(4095,-760) 6(640,-780) 6(1815,-780) 6(2557.48,-2050) 6(2565,-1765) 6(2990,-780) 6(4165,-780) 7(815,-750) 7(1990,-1649.08) 7(1990,-750) 7(2600,-2085) 7(3165,-750) 7(4340,-750) 8(725,-625) 8(1140,-2625) 8(1600,-1290) 8(1900,-625) 8(3075,-625) 8(4250,-625) 9(810,-665) 9(1985,-665) 9(3160,-665) 9(4335,-665) 10(905,-670) 10(2080,-670) 10(2240,-1105) 10(3255,-670) 10(4430,-670) 11(1100,-775) 11(2005,-1910) 11(2275,-775) 11(3450,-775) 11(4625,-775) 12(910,-815) 12(2050,-1910) 12(2085,-815) 12(3260,-815) 12(4435,-815) 13(915,-735) 13(1805,-1620) 13(2090,-735) 13(3265,-735) 13(4440,-735) 14(1760,-1620) 16(575,-1590) 16(1640,-888.39) 17(550,-2075) 17(1475,-1765) 17(2060,-890) 18(500,-2075) 18(1475,-1360) 18(2025,-925) 19(595,-1885) 19(2870,-888.39) 20(545,-1885) 20(1615,-930) 21(650,-2075) 21(2845,-930) 22(700,-2075) 23(535.07,-1840) 24(500,-1810) 25(870,-1710) 25(3390,-2125) 25(3440,-2125) 26(940,-1710) 27(885,-2090) 27(1625,-2260) 27(1625,-2200) 28(450,-2090) 28(2025,-2145) 29(800,-1740) 29(2075,-2145) 30(650,-1665) 31(740,-1805) 32(432.56,-1802.56) 33(995,-1635) 34(755,-1915) 35(1735,-1290) 36(1925,-1320) 37(2405,-1590) 38(2370,-1555) 39(3390,-1950) 41(2555,-1445) 42(2440,-1520) 43(2405,-1490) 44(1050,-1579.98) 45(1075,-1535) 45(5125,-1825) 46(2435,-1250) 47(1025,-1500) 48(865,-1530) 49(805,-1360) 50(2260,-1500) 50(3865,-1655) 50(4115,-1655) 50(4365,-1655) 50(4615,-1655) 50(4615,-1315) 51(635,-1590) 51(4365,-1315) 52(365,-1535) 53(2240,-1460) 54(675,-1500) 55(670,-1295) 56(2320,-1435) 56(3860,-1315) 57(2395,-1210) 57(4115,-1315) 58(605,-1490) 59(575,-1210) 59(3445,-890) 60(615,-1240) 60(3478.75,-930) 61(2280,-1255) 61(4645.83,-929.57) 62(2275,-1205) 62(4620.83,-889.57) 63(2310,-1170) 64(2255,-850) 70(2348.13,-2365) 73(2175,-2100) 76(1855,-1285) 79(3105,-1675) 80(3105,-1585) 81(3322.76,-1482.76) 82(3087.76,-1757.76) 84(1790,-1925) 84(1930,-1925) 86(2245,-1670) 88(1770,-1770) 89(1820,-1770) 91(1730,-1190) 92(1865,-1729.97) 93(2755,-1225) 94(2790,-1260) 95(2660,-1190) 96(2520,-1225)
  round 70 hole 50: 16(4850,-2025)
  round 40 hole 20: 41(3905,-1215) 42(4155,-1215) 43(4405,-1215) 44(4655,-1215) 46(3905,-1555) 47(4155,-1555) 48(4405,-1555) 49(4655,-1555) 58(4520.83,-984.57) 63(3343.75,-1025) 65(2276.25,-1025) 67(1085,-975) 69(2925,-1990.61) 74(1340,-975) 75(1090,-2350) 78(1910,-1025)
  round 60 hole 30: 68(2925,-2425)
  round 157.48 hole 102.36: ""(150,-2710) ""(150,-150) ""(5075,-2710) ""(5075,-150)

## Nets (pads, with @x,y where several pads share a name; then routed paths per layer and width w, separated by ;. In a path a pad name is that pad's centre, name@x,y a point inside that pad or via, vN(x,y) a via of type N, cw(c..) or ccw(c..) an arc to the next point about the centre after c; other vN are vias at no path point)
CO1_0: P3.1 R22.1 | length 189
  Bottom Layer w20: R22.1@505,-465 P3.1@505,-276
CO1_1: P3.2 R23.1 | length 309.9
  Top Layer w20: R23.1@455,-464.57 455,-224 P3.2@504,-175
CO1_2: P3.3 R25.1 | length 190.4
  Bottom Layer w10: P3.3@604,-275 P3.3@605,-276
  Bottom Layer w20: R25.1@605,-465 P3.3@605,-276
CO1_3: P3.4 R27.1 | length 309.9
  Top Layer w20: R27.1@555,-464.57 555,-224 P3.4@604,-175
CO1_4: P3.5 R30.1 | length 189
  Bottom Layer w20: R30.1@705,-465 P3.5@705,-276
CO1_5: P3.6 R32.1 | length 309.9
  Top Layer w20: R32.1@655,-464.57 655,-224 P3.6@704,-175
CO1_6: P3.7 R34.1 | length 188.6
  Bottom Layer w20: R34.1@805,-464.57 P3.7@805,-276
CO1_7: P3.8 R36.1 | length 309.9
  Top Layer w20: R36.1@755,-464.57 755,-224 P3.8@804,-175
CO1_8: P3.9 R38.2 | length 188.6
  Bottom Layer w20: R38.2@905,-464.57 P3.9@905,-276
CO1_9: P3.10 R37.2 | length 309.9
  Top Layer w20: R37.2@855,-464.57 855,-224 P3.10@904,-175
CO1_10: P3.11 R35.2 | length 188.6
  Bottom Layer w20: R35.2@1005,-464.57 P3.11@1005,-276
CO1_11: P3.12 R33.2 | length 309.9
  Top Layer w20: R33.2@955,-464.57 955,-224 P3.12@1004,-175
CO1_12: P3.13 R31.2 | length 190
  Bottom Layer w10: P3.13@1104,-275 P3.13@1105,-276
  Bottom Layer w20: R31.2@1105,-464.57 P3.13@1105,-276
CO1_13: P3.14 R28.2 | length 309.9
  Top Layer w20: R28.2@1055,-464.57 1055,-224 P3.14@1104,-175
CO1_14: P3.15 R26.2 | length 188.6
  Bottom Layer w20: R26.2@1205,-464.57 P3.15@1205,-276
CO1_15: P3.16 R24.2 | length 309.9
  Top Layer w20: R24.2@1155,-464.57 1155,-224 P3.16@1204,-175
CO2_0: P7.1 R70.1 | length 189
  Bottom Layer w20: R70.1@1680,-465 P7.1@1680,-276
CO2_1: P7.2 R73.1 | length 309.9
  Top Layer w20: R73.1@1630,-464.57 1630,-224 P7.2@1679,-175
CO2_2: P7.3 R77.1 | length 190.4
  Bottom Layer w10: P7.3@1779,-275 P7.3@1780,-276
  Bottom Layer w20: R77.1@1780,-465 P7.3@1780,-276
CO2_3: P7.4 R81.1 | length 309.9
  Top Layer w20: R81.1@1730,-464.57 1730,-224 P7.4@1779,-175
CO2_4: P7.5 R84.1 | length 189
  Bottom Layer w20: R84.1@1880,-465 P7.5@1880,-276
CO2_5: P7.6 R86.1 | length 309.9
  Top Layer w20: R86.1@1830,-464.57 1830,-224 P7.6@1879,-175
CO2_6: P7.7 R88.1 | length 188.6
  Bottom Layer w20: R88.1@1980,-464.57 P7.7@1980,-276
CO2_7: P7.8 R90.1 | length 309.9
  Top Layer w20: R90.1@1930,-464.57 1930,-224 P7.8@1979,-175
CO2_8: P7.9 R92.2 | length 188.6
  Bottom Layer w20: R92.2@2080,-464.57 P7.9@2080,-276
CO2_9: P7.10 R91.2 | length 309.9
  Top Layer w20: R91.2@2030,-464.57 2030,-224 P7.10@2079,-175
CO2_10: P7.11 R89.2 | length 188.6
  Bottom Layer w20: R89.2@2180,-464.57 P7.11@2180,-276
CO2_11: P7.12 R87.2 | length 309.9
  Top Layer w20: R87.2@2130,-464.57 2130,-224 P7.12@2179,-175
CO2_12: P7.13 R85.2 | length 190
  Bottom Layer w10: P7.13@2279,-275 P7.13@2280,-276
  Bottom Layer w20: R85.2@2280,-464.57 P7.13@2280,-276
CO2_13: P7.14 R82.2 | length 309.9
  Top Layer w20: R82.2@2230,-464.57 2230,-224 P7.14@2279,-175
CO2_14: P7.15 R78.2 | length 188.6
  Bottom Layer w20: R78.2@2380,-464.57 P7.15@2380,-276
CO2_15: P7.16 R74.2 | length 309.9
  Top Layer w20: R74.2@2330,-464.57 2330,-224 P7.16@2379,-175
CO3_0: P6.1 R52.1 | length 189
  Bottom Layer w20: R52.1@2855,-465 P6.1@2855,-276
CO3_1: P6.2 R55.1 | length 309.9
  Top Layer w20: R55.1@2805,-464.57 2805,-224 P6.2@2854,-175
CO3_2: P6.3 R59.1 | length 190.4
  Bottom Layer w10: P6.3@2954,-275 P6.3@2955,-276
  Bottom Layer w20: R59.1@2955,-465 P6.3@2955,-276
CO3_3: P6.4 R63.1 | length 309.9
  Top Layer w20: R63.1@2905,-464.57 2905,-224 P6.4@2954,-175
CO3_4: P6.5 R67.1 | length 189
  Bottom Layer w20: R67.1@3055,-465 P6.5@3055,-276
CO3_5: P6.6 R71.1 | length 309.9
  Top Layer w20: R71.1@3005,-464.57 3005,-224 P6.6@3054,-175
CO3_6: P6.7 R75.1 | length 188.6
  Bottom Layer w20: R75.1@3155,-464.57 P6.7@3155,-276
CO3_7: P6.8 R79.1 | length 309.9
  Top Layer w20: R79.1@3105,-464.57 3105,-224 P6.8@3154,-175
CO3_8: P6.9 R83.2 | length 188.6
  Bottom Layer w20: R83.2@3255,-464.57 P6.9@3255,-276
CO3_9: P6.10 R80.2 | length 309.9
  Top Layer w20: R80.2@3205,-464.57 3205,-224 P6.10@3254,-175
CO3_10: P6.11 R76.2 | length 188.6
  Bottom Layer w20: R76.2@3355,-464.57 P6.11@3355,-276
CO3_11: P6.12 R72.2 | length 309.9
  Top Layer w20: R72.2@3305,-464.57 3305,-224 P6.12@3354,-175
CO3_12: P6.13 R68.2 | length 190
  Bottom Layer w10: P6.13@3454,-275 P6.13@3455,-276
  Bottom Layer w20: R68.2@3455,-464.57 P6.13@3455,-276
CO3_13: P6.14 R64.2 | length 309.9
  Top Layer w20: R64.2@3405,-464.57 3405,-224 P6.14@3454,-175
CO3_14: P6.15 R60.2 | length 188.6
  Bottom Layer w20: R60.2@3555,-464.57 P6.15@3555,-276
CO3_15: P6.16 R56.2 | length 309.9
  Top Layer w20: R56.2@3505,-464.57 3505,-224 P6.16@3554,-175
CO4_0: P5.1 R44.1 | length 189
  Bottom Layer w20: R44.1@4030,-465 P5.1@4030,-276
CO4_1: P5.2 R45.1 | length 309.9
  Top Layer w20: R45.1@3980,-464.57 3980,-224 P5.2@4029,-175
CO4_2: P5.3 R48.1 | length 190.4
  Bottom Layer w10: P5.3@4129,-275 P5.3@4130,-276
  Bottom Layer w20: R48.1@4130,-465 P5.3@4130,-276
CO4_3: P5.4 R50.1 | length 309.9
  Top Layer w20: R50.1@4080,-464.57 4080,-224 P5.4@4129,-175
CO4_4: P5.5 R53.1 | length 189
  Bottom Layer w20: R53.1@4230,-465 P5.5@4230,-276
CO4_5: P5.6 R57.1 | length 309.9
  Top Layer w20: R57.1@4180,-464.57 4180,-224 P5.6@4229,-175
CO4_6: P5.7 R61.1 | length 188.6
  Bottom Layer w20: R61.1@4330,-464.57 P5.7@4330,-276
CO4_7: P5.8 R65.1 | length 309.9
  Top Layer w20: R65.1@4280,-464.57 4280,-224 P5.8@4329,-175
CO4_8: P5.9 R69.2 | length 188.6
  Bottom Layer w20: R69.2@4430,-464.57 P5.9@4430,-276
CO4_9: P5.10 R66.2 | length 309.9
  Top Layer w20: R66.2@4380,-464.57 4380,-224 P5.10@4429,-175
CO4_10: P5.11 R62.2 | length 188.6
  Bottom Layer w20: R62.2@4530,-464.57 P5.11@4530,-276
CO4_11: P5.12 R58.2 | length 309.9
  Top Layer w20: R58.2@4480,-464.57 4480,-224 P5.12@4529,-175
CO4_12: P5.13 R54.2 | length 190
  Bottom Layer w10: P5.13@4629,-275 P5.13@4630,-276
  Bottom Layer w20: R54.2@4630,-464.57 P5.13@4630,-276
CO4_13: P5.14 R51.2 | length 309.9
  Top Layer w20: R51.2@4580,-464.57 4580,-224 P5.14@4629,-175
CO4_14: P5.15 R49.2 | length 188.6
  Bottom Layer w20: R49.2@4730,-464.57 P5.15@4730,-276
CO4_15: P5.16 R46.2 | length 309.9
  Top Layer w20: R46.2@4680,-464.57 4680,-224 P5.16@4729,-175
CPU_3V3: C20.2 C21.2 C22.2 C23.2 C24.2 D1.1 D2.1 D3.1 D4.1 D5.1 D8.1 L1.2 L2.1 L3.1 L4.2 P1.1 pad.31 pad.32 pad.34 pad.48@865,-1530 pad.49@805,-1360 pad.58@4520.83,-984.57 pad.63@3343.75,-1025 pad.64 pad.65 pad.67 pad.68 pad.69 pad.74 pad.75 pad.76 pad.78 Q1.1 Q2.1 Q3.1 Q4.1 Q5.1 Q6.1 Q7.1 Q8.1 R1.2 R3.1 R4.1 R5.2 R6.2 R8.2 R9.2 R10.2 R11.1 R17.2 R18.1 R100.2 R101.2 R102.2 R103.2 R109.2 R110.1 R111.1 R112.2 R113.1 R114.1 U4.24 U5.3 U5.21 U5.24 U6.3 U6.24 U7.21 U7.24 U9.4 U9.7 U9.11 U9.13 U10.22 U10.32 U10.48 W2.2 Y3.4 | length 18809.2
  Top Layer w10: R109.2@350,-1802.56 pad.32@432.56,-1802.56 500,-1870 R100.2@500,-1972.44 R101.2@550,-1972.44 600,-1972.44 ; C24.2@475,-1152.44 514.29,-1152.44 ; U10.48@516.73,-1400.71 516.73,-1128.27 605,-1040 765,-1040 ; U9.4@600,-2190 600,-1972.44 ; U10.22@693.9,-1739.29 693.9,-1783.9 715,-1805 pad.31@740,-1805 ; U10.32@794.29,-1540.47 854.53,-1540.47 pad.48@865,-1530 ; R110.1@802.56,-1300 802.56,-1232.56 765.56,-1195.56 765.56,-1039.44 Y3.4@863.43,-941.57 ; pad.49@805,-1360 R110.1@805,-1302.44 ; 957.56,-1935 880,-1935 860,-1915 pad.34@755,-1915 725,-1915 700,-1940 R102.2@700,-1972.44 R103.2@650,-1972.44 600,-1972.44 ; 962.56,-2347.56 R111.1@962.56,-1840 R114.1@962.56,-1785 1005,-1785 1050,-1740 R113.1@1050,-1707.56 ; 1090,-2230 R18.1@1477.44,-2230 ; R1.2@1852.56,-1230 R5.2@1852.56,-1175 ; R6.2@1852.56,-1055 R8.2@1852.56,-990 ; R9.2@1855,-1347.44 pad.76@1855,-1285 R1.2@1855,-1230 ; 1855.06,-1025 pad.78@1910,-1025 ; R10.2@2165,-1097.44 2165,-1055 2195,-1025 pad.65@2276.25,-1025 ; pad.64@2255,-850 2276.25,-871.25 pad.65@2276.25,-1025 ; L3.1@2480,-1097.44 2480,-1055 2450,-1025 pad.65@2276.25,-1025
  Top Layer w15: U9.7@750,-2290 810,-2350 pad.75@1090,-2350 ; Y3.4@863.43,-941.57 1051.57,-941.57 pad.67@1085,-975 ; D1.1@1150,-2760 1150,-2700 ; pad.74@1340,-975 1355,-990 P1.1@1455,-990 ; D3.1@1950,-2760 1950,-2700 ; D2.1@2150,-2760 2150,-2700 ; 2467.56,-2425 R11.1@2467.56,-2365 ; pad.69@2925,-1990.61 L2.1@2925,-1927.56 ; pad.69@2940,-1992.44 L1.2@3005,-1992.44 ; L4.2@3410,-1482.44 3410,-1075 ; D4.1@4050,-2760 4050,-2690 ; D5.1@4250,-2760 4250,-2690 ; pad.58@4520.83,-984.57 R3.1@4588.27,-984.57 ; 4710,-1065 R4.1@4710,-947.56
  Top Layer w20: U9.11@360,-2700 420,-2760 790,-2760 ; U9.13@790,-2700 790,-2760 ; R17.2@1229.57,-2100 1150,-2100 1090,-2160 pad.75@1090,-2350 1090,-2700 ; pad.69@2925,-1990.61 pad.68@2925,-2425 2370,-2425 2150,-2645 2150,-2700 1950,-2700 1150,-2700 1090,-2700 ; pad.63@3343.75,-1025 3393.75,-1075 3410,-1075 3728.75,-1075 ; 4520.83,-1049.57 pad.58@4520.83,-984.57 ; 790,-2760 945,-2760 1005,-2700 1090,-2700
  Top Layer w25: pad.68@2925,-2425 2925,-2640 3035,-2750 3825,-2750 3885,-2690 4050,-2690 4250,-2690 4405,-2690 D8.1@4475,-2760
  Bottom Layer w10: C20.2@430,-1972.44 430,-1805.12 pad.32@432.56,-1802.56 460.12,-1775 595,-1775 625,-1805 pad.31@740,-1805 ; C23.2@600,-2372.44 U9.4@600,-2190 600,-2240 700,-2240 U9.7@750,-2290 750,-2340 717.56,-2372.44 C21.2@650,-2372.44 ; C22.2@755,-1972.44 pad.34@755,-1915 ; pad.49@805,-1360 865,-1420 pad.48@865,-1530 ; pad.76@1855,-1285 1910,-1230 pad.78@1910,-1025
  Bottom Layer w15: U4.24@995.83,-939.57 1049.57,-939.57 pad.67@1085,-975 ; U7.24@2170.83,-939.57 2249.57,-939.57 2276.25,-966.25 pad.65@2276.25,-1025 ; U7.21@2170.83,-862.8 2242.2,-862.8 pad.64@2255,-850 ; U6.3@3072.92,-888.39 3192.14,-888.39 3243.32,-939.57 U6.24@3344.58,-939.57 ; pad.63@3343.75,-1025 U6.24@3343.75,-940 ; U5.3@4245,-887.95 4367.44,-887.95 4367.44,-921.18 4430.83,-984.57 pad.58@4520.83,-984.57 U5.24@4520.83,-939.57 ; 4369.17,-886.22 4393.03,-862.36 U5.21@4516.65,-862.36
  Bottom Layer w20: pad.67@1085,-975 pad.74@1340,-975 1770,-975 1820,-1025 pad.78@1910,-1025 pad.65@2276.25,-1025 pad.63@3343.75,-1025 pad.63@3345,-1025
  Bottom Layer w25: D8.1@4475,-2760 4475,-2445 4700,-2220 4700,-1800 4825,-1675 W2.2@4880,-1675
E-CRS: pad.54 pad.56@2320,-1435 U10.40 | length 1968.1
  Top Layer w10: pad.54@674.21,-1499.21 U10.40@674.21,-1400.71
  Bottom Layer w10: pad.54@675,-1500 675,-1410 770,-1315 838.43,-1315 948.43,-1425 1110,-1425 1165,-1480 2165,-1480 2220,-1425 2310,-1425 pad.56@2320,-1435
E-CSR: U1.92 | length 81
  Top Layer w10: 2321.26,-1433.74 U1.92@2321.26,-1352.76
E-MDC: pad.43@2405,-1490 pad.45@1075,-1535 U1.87 U10.31 | length 1803.8
  Top Layer w10: U10.31@794.29,-1560.16 1014.84,-1560.16 1040,-1535 pad.45@1075,-1535 ; pad.43@2405,-1490 2419.68,-1475.32 U1.87@2419.68,-1352.76
  Bottom Layer w10: pad.45@1075,-1535 1100,-1560 2275,-1560 2345,-1490 pad.43@2405,-1490
E-MDIO: pad.42@2440,-1520 pad.44@1050,-1579.98 R113.2 U1.86 U10.30 | length 1909.7
  Top Layer w10: U10.30@794.29,-1579.84 1049.86,-1579.84 pad.44@1050,-1579.98 R113.2@1050,-1652.44 ; pad.42@2439.37,-1519.37 U1.86@2439.37,-1352.76
  Bottom Layer w10: pad.44@1050,-1579.98 2285.02,-1579.98 2345,-1520 pad.42@2440,-1520
E-REF-CLK: pad.46@2435,-1250 pad.47@1025,-1500 U1.88 U10.34 Y3.3 | length 2460
  Top Layer w10: U10.34@794.29,-1501.1 1025,-1501.1 1025,-1190 973.43,-1138.43 Y3.3@863.43,-1138.43 ; U1.88@2400,-1352.76 2400,-1285 pad.46@2435,-1250
  Bottom Layer w10: pad.47@1025,-1500 1095,-1500 1135,-1540 2266.72,-1540 2435,-1371.72 pad.46@2435,-1250
E-RX-ER: pad.55 pad.57@2395,-1210 U1.89 U10.41 | length 2236.9
  Top Layer w10: U10.41@654.53,-1400.71 654.53,-1310.47 pad.55@670,-1295 ; U1.89@2380.32,-1352.76 2380.32,-1224.68 pad.57@2395,-1210
  Bottom Layer w10: pad.55@670,-1295 846.72,-1295 956.72,-1405 1120,-1405 1175,-1460 2155,-1460 2215,-1400 2340,-1400 2380,-1360 2380,-1225 pad.57@2395,-1210
E-RXD0: pad.60@615,-1240 pad.62@2275,-1205 U1.91 U10.43 | length 2194.5
  Top Layer w10: pad.60@615,-1240 U10.43@615.16,-1400.71 ; pad.62@2275,-1205 2340.94,-1270.94 U1.91@2340.94,-1352.76
  Bottom Layer w10: pad.60@615,-1240 850,-1240 975,-1365 1140,-1365 1195,-1420 2120,-1420 2245,-1295 2245,-1235 pad.62@2275,-1205
E-RXD1: pad.59@575,-1210 pad.63@2310,-1170 U1.90 U10.44 | length 2358.7
  Top Layer w10: pad.59@575,-1210 575,-1275 595.47,-1295.47 U10.44@595.47,-1400.71 ; pad.63@2310,-1170 2360.63,-1220.63 U1.90@2360.63,-1352.76
  Bottom Layer w10: pad.59@575,-1210 850,-1210 985,-1345 1150,-1345 1205,-1400 2110,-1400 2225,-1285 2225,-1205 2260,-1170 pad.63@2310,-1170
E-TX-EN: pad.58@605,-1490 pad.61@2280,-1255 U1.93 U10.2 | length 2315.7
  Top Layer w10: U10.2@455.71,-1481.42 596.42,-1481.42 pad.58@605,-1490 ; pad.61@2280,-1255 2301.57,-1276.57 U1.93@2301.57,-1352.76
  Bottom Layer w10: pad.58@605,-1490 630,-1465 630,-1285 655,-1260 840,-1260 965,-1385 1130,-1385 1185,-1440 2145,-1440 2280,-1305 pad.61@2280,-1255
E-TXD0: pad.52 pad.53 U1.95 U10.3 | length 2237
  Top Layer w10: pad.52@365,-1535 398.9,-1501.1 U10.3@455.71,-1501.1 ; pad.53@2240,-1460 2262.2,-1437.8 U1.95@2262.2,-1352.76
  Bottom Layer w10: pad.52@365,-1535 635,-1535 670,-1570 920,-1570 950,-1540 950,-1480 985,-1445 1100,-1445 1155,-1500 2200,-1500 pad.53@2240,-1460
E-TXD1: pad.50@2260,-1500 pad.51@635,-1590 U1.94 U10.4 | length 2111.2
  Top Layer w10: U10.4@455.71,-1520.79 565.79,-1520.79 pad.51@635,-1590 ; pad.50@2260,-1500 2281.89,-1478.11 U1.94@2281.89,-1352.76
  Bottom Layer w10: pad.51@635,-1590 930,-1590 970,-1550 970,-1488.28 993.28,-1465 1090,-1465 1145,-1520 2245,-1520 2260,-1505 pad.50@2260,-1500
F-CS: U1.63 U3.4 | length 699.8
  Top Layer w10: U1.63@2697.24,-1650 3040,-1650 3070,-1620 3275,-1620 3320.79,-1665.79 U3.4@3320.79,-1710.67
F-RES: U1.59 U3.3 | length 633.2
  Top Layer w10: U1.59@2697.24,-1728.74 3108.74,-1728.74 3145,-1765 3255,-1765 3269.61,-1750.39 U3.3@3269.61,-1710.67
F-SCK: U1.62 U3.2 | length 552.8
  Top Layer w10: 2735,-1670 3050,-1670 3080,-1640 3195,-1640 3218.43,-1663.43 U3.2@3218.43,-1710.67
F-SI: U1.60 U3.1 | length 470
  Top Layer w10: U1.60@2697.24,-1709.06 U3.1@3167.24,-1709.06
F-SO: pad.79 pad.80 U1.61 U3.8 | length 693.2
  Top Layer w10: U1.61@2697.24,-1689.37 3090.63,-1689.37 pad.79@3105,-1675 ; pad.80@3105,-1585 3167.24,-1522.76 U3.8@3167.24,-1421.3
  Bottom Layer w10: pad.79@3105,-1675 pad.80@3105,-1585
F-WP: pad.81 pad.82 U1.58 U3.5 | length 875
  Top Layer w10: U1.58@2697.24,-1748.43 3078.43,-1748.43 pad.82@3087.76,-1757.76 ; pad.81@3322.76,-1482.76 U3.5@3322.76,-1421.3
  Bottom Layer w10: pad.82@3087.76,-1757.76 3152.76,-1692.76 3152.76,-1572.76 3242.76,-1482.76 pad.81@3322.76,-1482.76